# EAGLE board Fantabulous Maimu (EAGLE 9.7.0)

Size 147.06 x 103.61 mm. Coordinates in mm from the lower left corner, seen from the top.
Outline: 0,0 147.06,0 147.06,103.61 0,103.61 0,0
Copper layers (1*16): Top 0.035mm / dielectric 1.5mm / Bottom 0.035mm
Design rules "default": minimum track width 6mil, minimum drill 0.35mm, track to track 6mil, track to pad 6mil, pad to pad 6mil, via to via 6mil, smd to smd 6mil, copper to edge 40mil, drill to drill 6mil, minimum pad ring 10mil, minimum via ring 8mil, stop-mask expansion 4mil, vias tented up to drill 0mil, thermal gap 10mil

## Footprints (pad centres in the part's own frame; a part is rotated, then mirrored left to right if it is on the bottom)
LEDRD254W60D565H860B = drill 0.981 pad 1.581: 1 -1.27,0; 2 1.27,0
BATTERY-GENERIC = drill 1.118 pad 3.15 octagon: + 2.54,0; - -2.54,0
SWITCH-SPDT-PTH-8.5X3.7MM = drill 1.016 pad 1.88: 1 -2.54,0; 2 0,0; 3 2.54,0
DIP762W53P254L1969H508Q14B = drill 0.743 pad 1.343: 1 -3.81,7.62; 2 -3.81,5.08; 3 -3.81,2.54; 4 -3.81,0; 5 -3.81,-2.54; 6 -3.81,-5.08; 7 -3.81,-7.62; 8 3.81,-7.62; 9 3.81,-5.08; 10 3.81,-2.54; 11 3.81,0; 12 3.81,2.54; 13 3.81,5.08; 14 3.81,7.62

## Placement (x,y rotation side)
D1  RED  [LEDRD254W60D565H860B]  111.22,95.7 180 top
D2  RED  [LEDRD254W60D565H860B]  119.42,95.34 180 top
D3  RED  [LEDRD254W60D565H860B]  137.46,67.09 180 top
D4  RED  [LEDRD254W60D565H860B]  138.19,58.89 180 top
D5  RED  [LEDRD254W60D565H860B]  48.53,8.05 180 top
D6  RED  [LEDRD254W60D565H860B]  55.09,8.41 180 top
P1  BATTERYGENERIC  [BATTERY-GENERIC]  8.26,70.55 180 top
S1  TOGGLE  [SWITCH-SPDT-PTH-8.5X3.7MM]  80.78,96.07 0 top
S2  TOGGLE  [SWITCH-SPDT-PTH-8.5X3.7MM]  94.09,96.43 0 top
S3  TOGGLE  [SWITCH-SPDT-PTH-8.5X3.7MM]  139.64,46.68 0 top
S4  TOGGLE  [SWITCH-SPDT-PTH-8.5X3.7MM]  139.64,35.75 0 top
S5  TOGGLE  [SWITCH-SPDT-PTH-8.5X3.7MM]  82.79,10.24 0 top
S6  TOGGLE  [SWITCH-SPDT-PTH-8.5X3.7MM]  70.94,9.87 0 top
U1  74HC04_PDIP  [DIP762W53P254L1969H508Q14B]  76.96,45.95 90 top

## Library data of the parts
D1-D6 = Tinkercad; CATEGORY: Opto-Electronic; SUB-CATEGORY: LED; VALUE: LED_RED
P1 S1-S6 U1 = Tinkercad

## Nets
P1+: P1.+ S1.1 S2.1 S3.1 S4.1 S5.1 S6.1 U1.14
P1-: D1.2 D2.2 D3.2 D4.2 D5.2 D6.2 P1.- S1.3 S2.3 S3.3 S4.3 S5.3 S6.3 U1.7
U1_1A: S6.2 U1.1
U1_1Y: D5.1 U1.2
U1_2A: S5.2 U1.3
U1_2Y: D6.1 U1.4
U1_3A: S4.2 U1.5
U1_3Y: D4.1 U1.6
U1_4A: S3.2 U1.9
U1_4Y: D3.1 U1.8
U1_5A: S2.2 U1.11
U1_5Y: D2.1 U1.10
U1_6A: S1.2 U1.13
U1_6Y: D1.1 U1.12

## Tracks (layer width: path | path; a pad name or v marks a point on that pad's centre or on a via)
P1+  (7 unrouted)
P1-  (13 unrouted)
U1_1A  (1 unrouted)
U1_1Y  (1 unrouted)
U1_2A  (1 unrouted)
U1_2Y  (1 unrouted)
U1_3A  (1 unrouted)
U1_3Y  (1 unrouted)
U1_4A  (1 unrouted)
U1_4Y  (1 unrouted)
U1_5A  (1 unrouted)
U1_5Y  (1 unrouted)
U1_6A  (1 unrouted)
U1_6Y  (1 unrouted)